# EAGLE board kgopalak_TH (EAGLE 8.3.2)
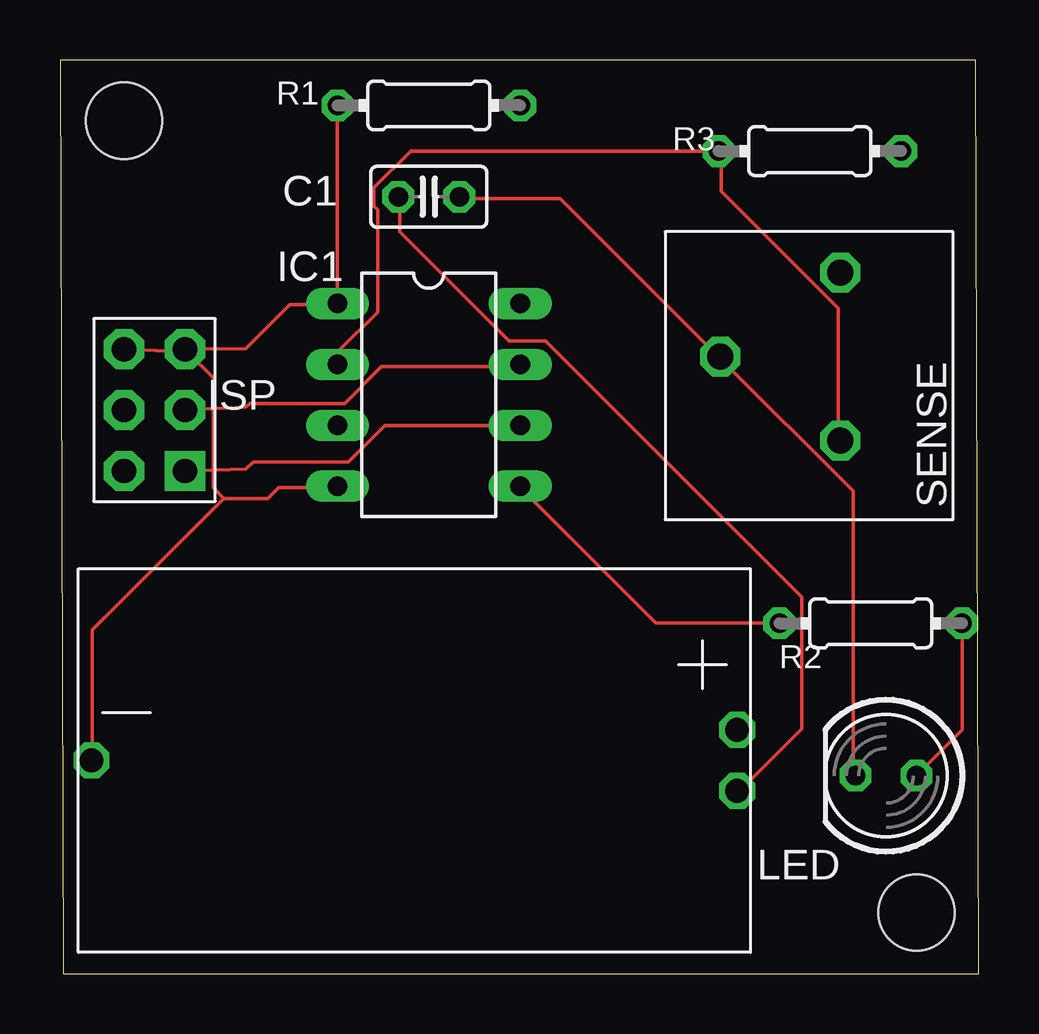
[diagram p0: board, top side]
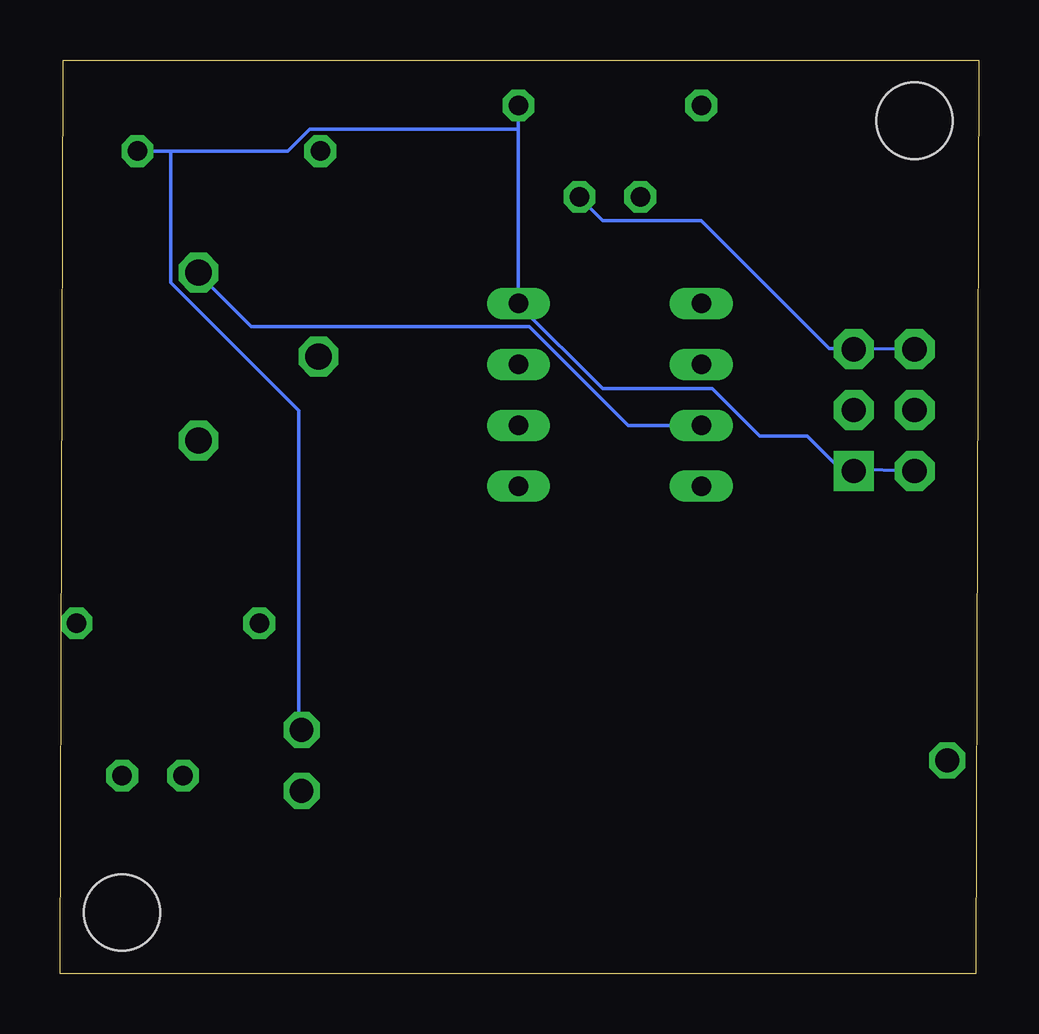
[diagram p1: board, bottom side, seen from below]

Size 38.28 x 38.09 mm. Coordinates in mm from the lower left corner, seen from the top.
Outline: 0.13,0 38.28,0 38.15,38.09 0,38.09 0.13,0
Copper layers (1*16): Top 0.035mm / dielectric 1.5mm / Bottom 0.035mm
Design rules "default": minimum track width 6mil, minimum drill 0.35mm, track to track 6mil, track to pad 6mil, pad to pad 6mil, via to via 6mil, smd to smd 6mil, copper to edge 40mil, drill to drill 6mil, minimum pad ring 10mil, minimum via ring 8mil, stop-mask expansion 4mil, vias tented up to drill 0mil, thermal gap 10mil
Holes 3.17 mm at 2.67,35.56 35.69,2.54

## Footprints (pad centres in the part's own frame; a part is rotated, then mirrored left to right if it is on the bottom)
BA2032 = drill 0.991 octagon: P$1 0.55,0; P$2 27.45,1.27; P$3 27.45,-1.27
C025-025X050 = drill 0.813 octagon: 1 -1.27,0; 2 1.27,0
DIL08 = drill 0.813 long: 1 -3.81,-3.81; 2 -1.27,-3.81; 3 1.27,-3.81; 4 3.81,-3.81; 5 3.81,3.81; 6 1.27,3.81; 7 -1.27,3.81; 8 -3.81,3.81
6P2R0.1IN = drill 1.016 pad 1.676 square: 1 0,0 | drill 1.016 pad 1.676 octagon: 2 0,2.54; 3 2.54,0; 4 2.54,2.54; 5 5.08,0; 6 5.08,2.54
LED5MM = drill 0.813 octagon: A -1.27,0; K 1.27,0
0204/7 = drill 0.813 octagon: 1 -3.81,0; 2 3.81,0
PUSHCON3 = drill 1.1 octagon: 1 0,0; 2 3.5,5; 3 7,0

## Placement (x,y rotation side)
BATTERY  BATTERYTH_BA2032  [BA2032]  0.76,8.89 0 top
C1  0.1uF  [C025-025X050]  15.37,32.38 0 top
IC1  ATTINY25TH_ATTINY  [DIL08]  15.37,24.13 270 top
ISP  [6P2R0.1IN]  5.21,20.95 90 top
LED  [LED5MM]  34.42,8.25 180 top
R1  4700  [0204/7]  15.37,36.2 0 top
R2  100  [0204/7]  33.78,14.6 0 top
R3  4700  [0204/7]  31.24,34.29 0 top
SENSE  3PINCONTH_3PIN  [PUSHCON3]  32.51,22.23 90 top

## Library data of the parts
BATTERY C1 IC1 ISP LED R1-R3 SENSE = TinyGadget(1)

## Nets
GND: BATTERY.P$1 C1.2 IC1.4 ISP.6 LED.K SENSE.2
MISO: IC1.6 ISP.1
MOSI/LED: IC1.5 R2.1
N$1: LED.A R2.2
N$3: ISP.4
N$14: BATTERY.P$3 C1.1
RESET: IC1.1 ISP.5 R1.1
SCK: IC1.7 ISP.3
SENSOR1: IC1.2 R3.1 SENSE.1
SENSOR2: IC1.3 SENSE.3
VCC: BATTERY.P$2 IC1.8 ISP.2 R1.2 R3.2

## Tracks (layer width: path | path; a pad name or v marks a point on that pad's centre or on a via)
GND
  Top 0.152: 6.83,19.81 8.66,19.81 9.12,20.27 11.56,20.27 IC1.4 | 6.83,19.81 6.38,20.27 6.38,24.84 5.31,25.91 ISP.6 | 6.83,19.81 1.35,14.33 1.35,8.99 BATTERY.P$1 | LED.K 33.05,8.38 33.05,20.12 27.56,25.6 SENSE.2 27.41,25.76 20.85,32.31 16.74,32.31 C1.2
  Bottom 0.152: ISP.6 5.31,26.06 6.22,26.06 11.56,31.39 15.67,31.39 16.59,32.31 C1.2
MISO
  Top 0.152: IC1.6 13.54,22.86 12.01,21.34 8.05,21.34 7.75,21.03 ISP.1
MOSI/LED
  Top 0.152: R2.1 29.84,14.63 24.82,14.63 19.18,20.27 IC1.5
N$1
  Top 0.152: R2.2 37.59,10.16 LED.A
N$14
  Top 0.152: C1.1 14.15,32.31 14.15,30.94 18.72,26.37 20.24,26.37 30.91,15.7 30.91,10.21 28.32,7.62 BATTERY.P$3
RESET
  Top 0.152: ISP.5 7.75,26.06 9.58,27.89 11.56,27.89 IC1.1 R1.1
S$1  (via drill 0.35)
  other vias: 2.67,35.56
S$2  (via drill 0.35)
  other vias: 35.69,2.54
SCK
  Top 0.152: IC1.7 19.18,25.3 13.39,25.3 11.86,23.77 7.9,23.77 7.75,23.62 ISP.3
SENSOR1
  Top 0.152: IC1.2 11.56,25.91 13.23,27.58 13.23,31.85 13.08,32 13.08,32.77 14.61,34.29 R3.1 27.56,34.29 27.56,32.61 32.44,27.74 32.44,22.25 SENSE.1
SENSOR2
  Bottom 0.152: IC1.3 14.61,22.86 18.72,26.98 30.3,26.98 32.44,29.11 SENSE.3
VCC
  Bottom 0.152: R1.2 19.18,35.2 | 19.18,35.2 IC1.8 19.18,27.89 15.67,24.38 11.1,24.38 9.12,22.4 7.14,22.4 5.77,21.03 5.31,21.03 ISP.2 | 33.66,34.29 28.78,34.29 27.86,35.2 19.18,35.2 | 33.66,34.29 R3.2 | 33.66,34.29 33.66,28.8 28.32,23.47 28.32,10.21 BATTERY.P$2